# Altium PCB WCH_hairDrierBOTTOM_COM_V1.5.PcbDoc
Units mil, origin at the board's own origin, x right, y up, seen from the top; angles counter-clockwise.
Board outline 2681.13 x 2654.17 mil, 2 copper layers (Top Layer, Bottom Layer); 68 components, 37 nets, 171 pads, 211 vias.
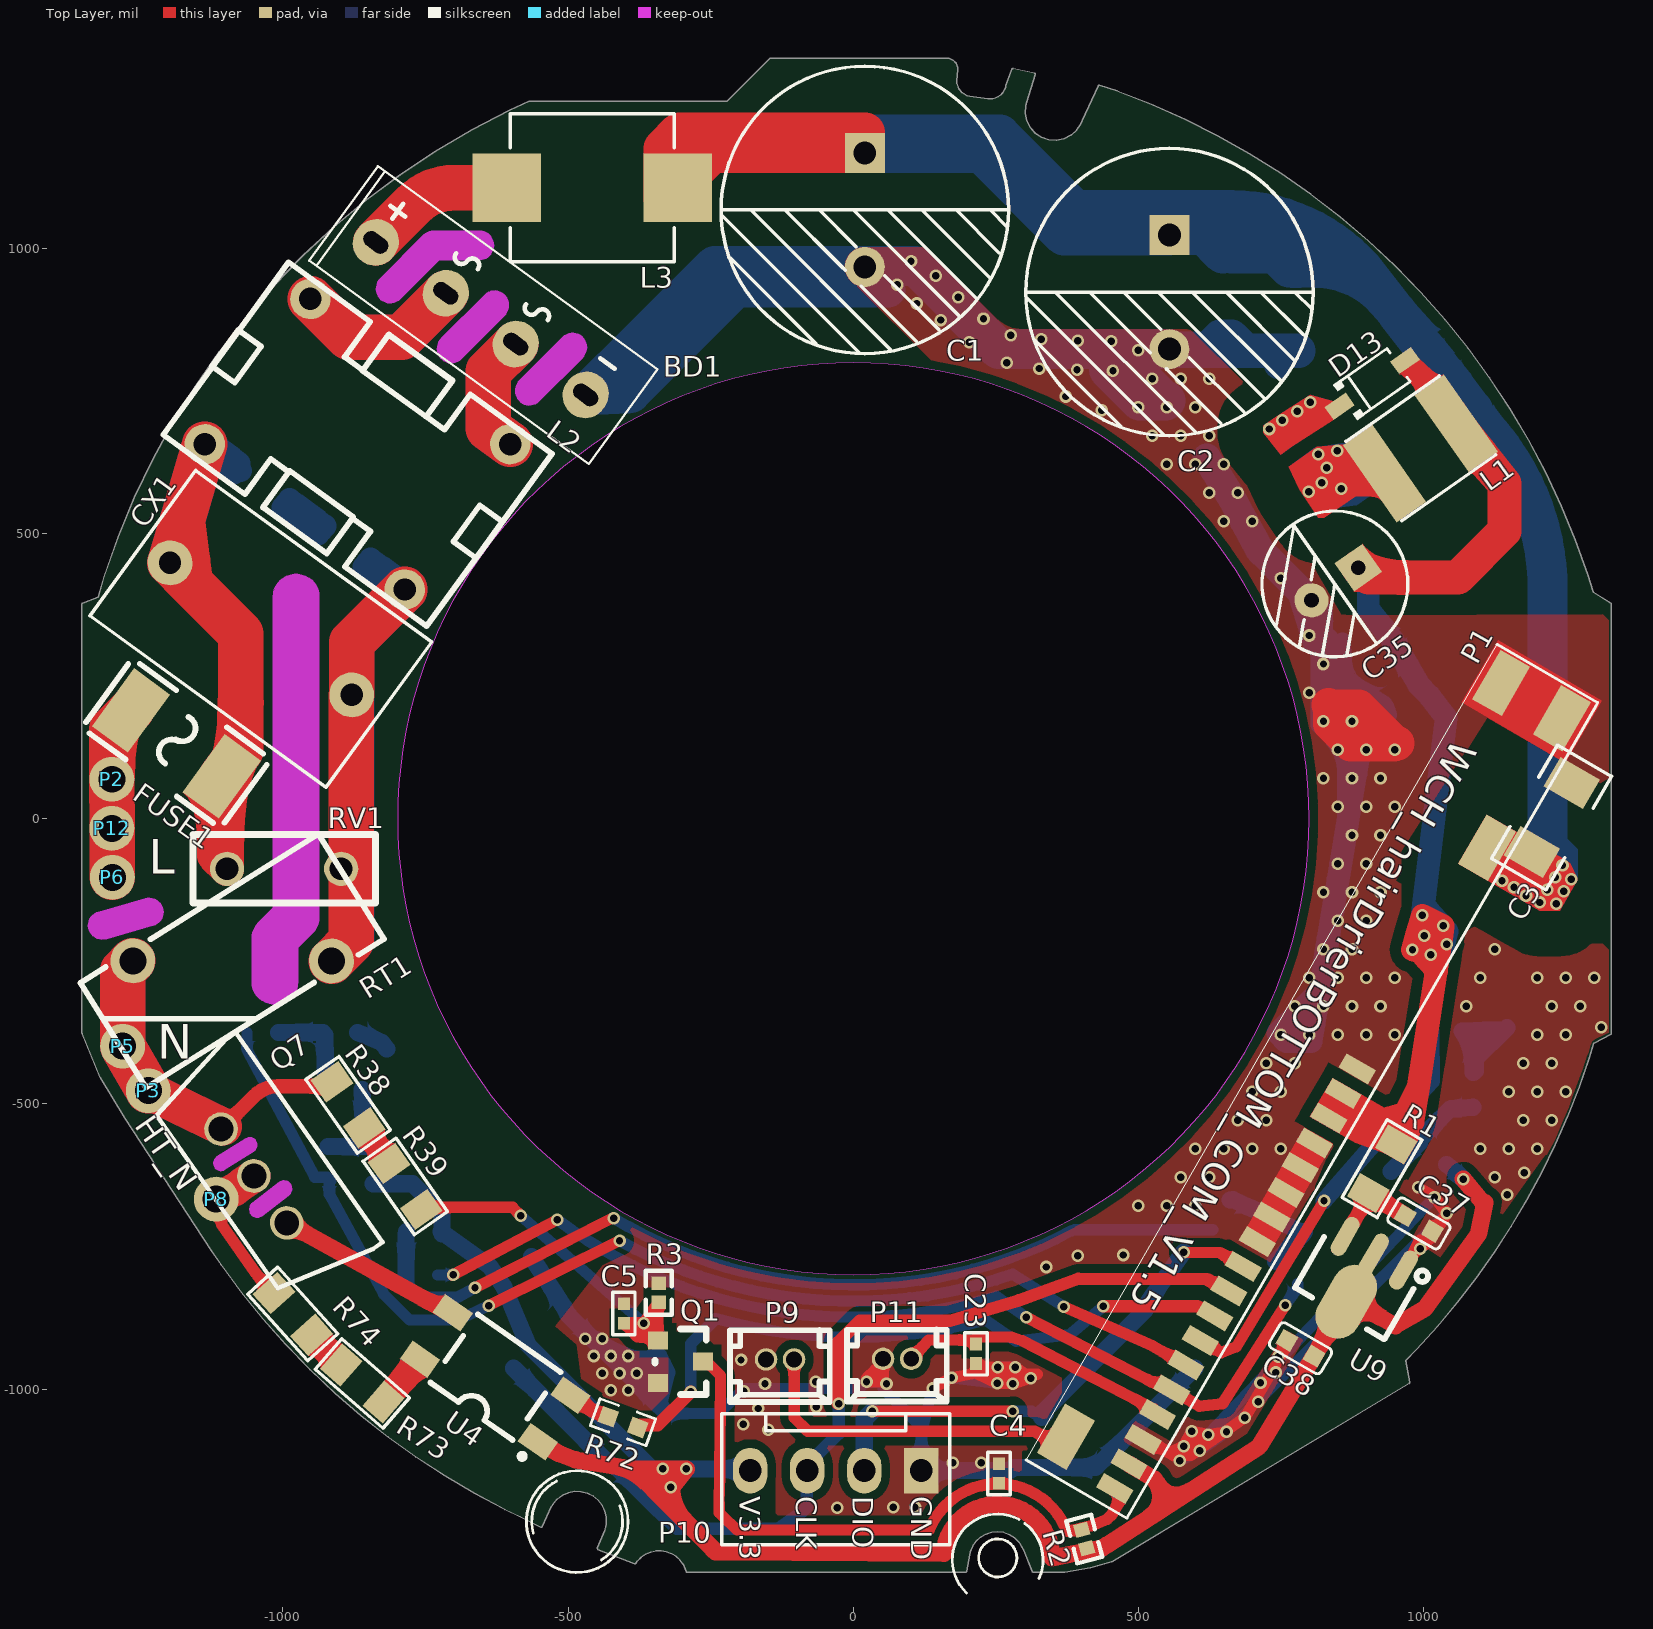
[diagram p0: Top Layer view]
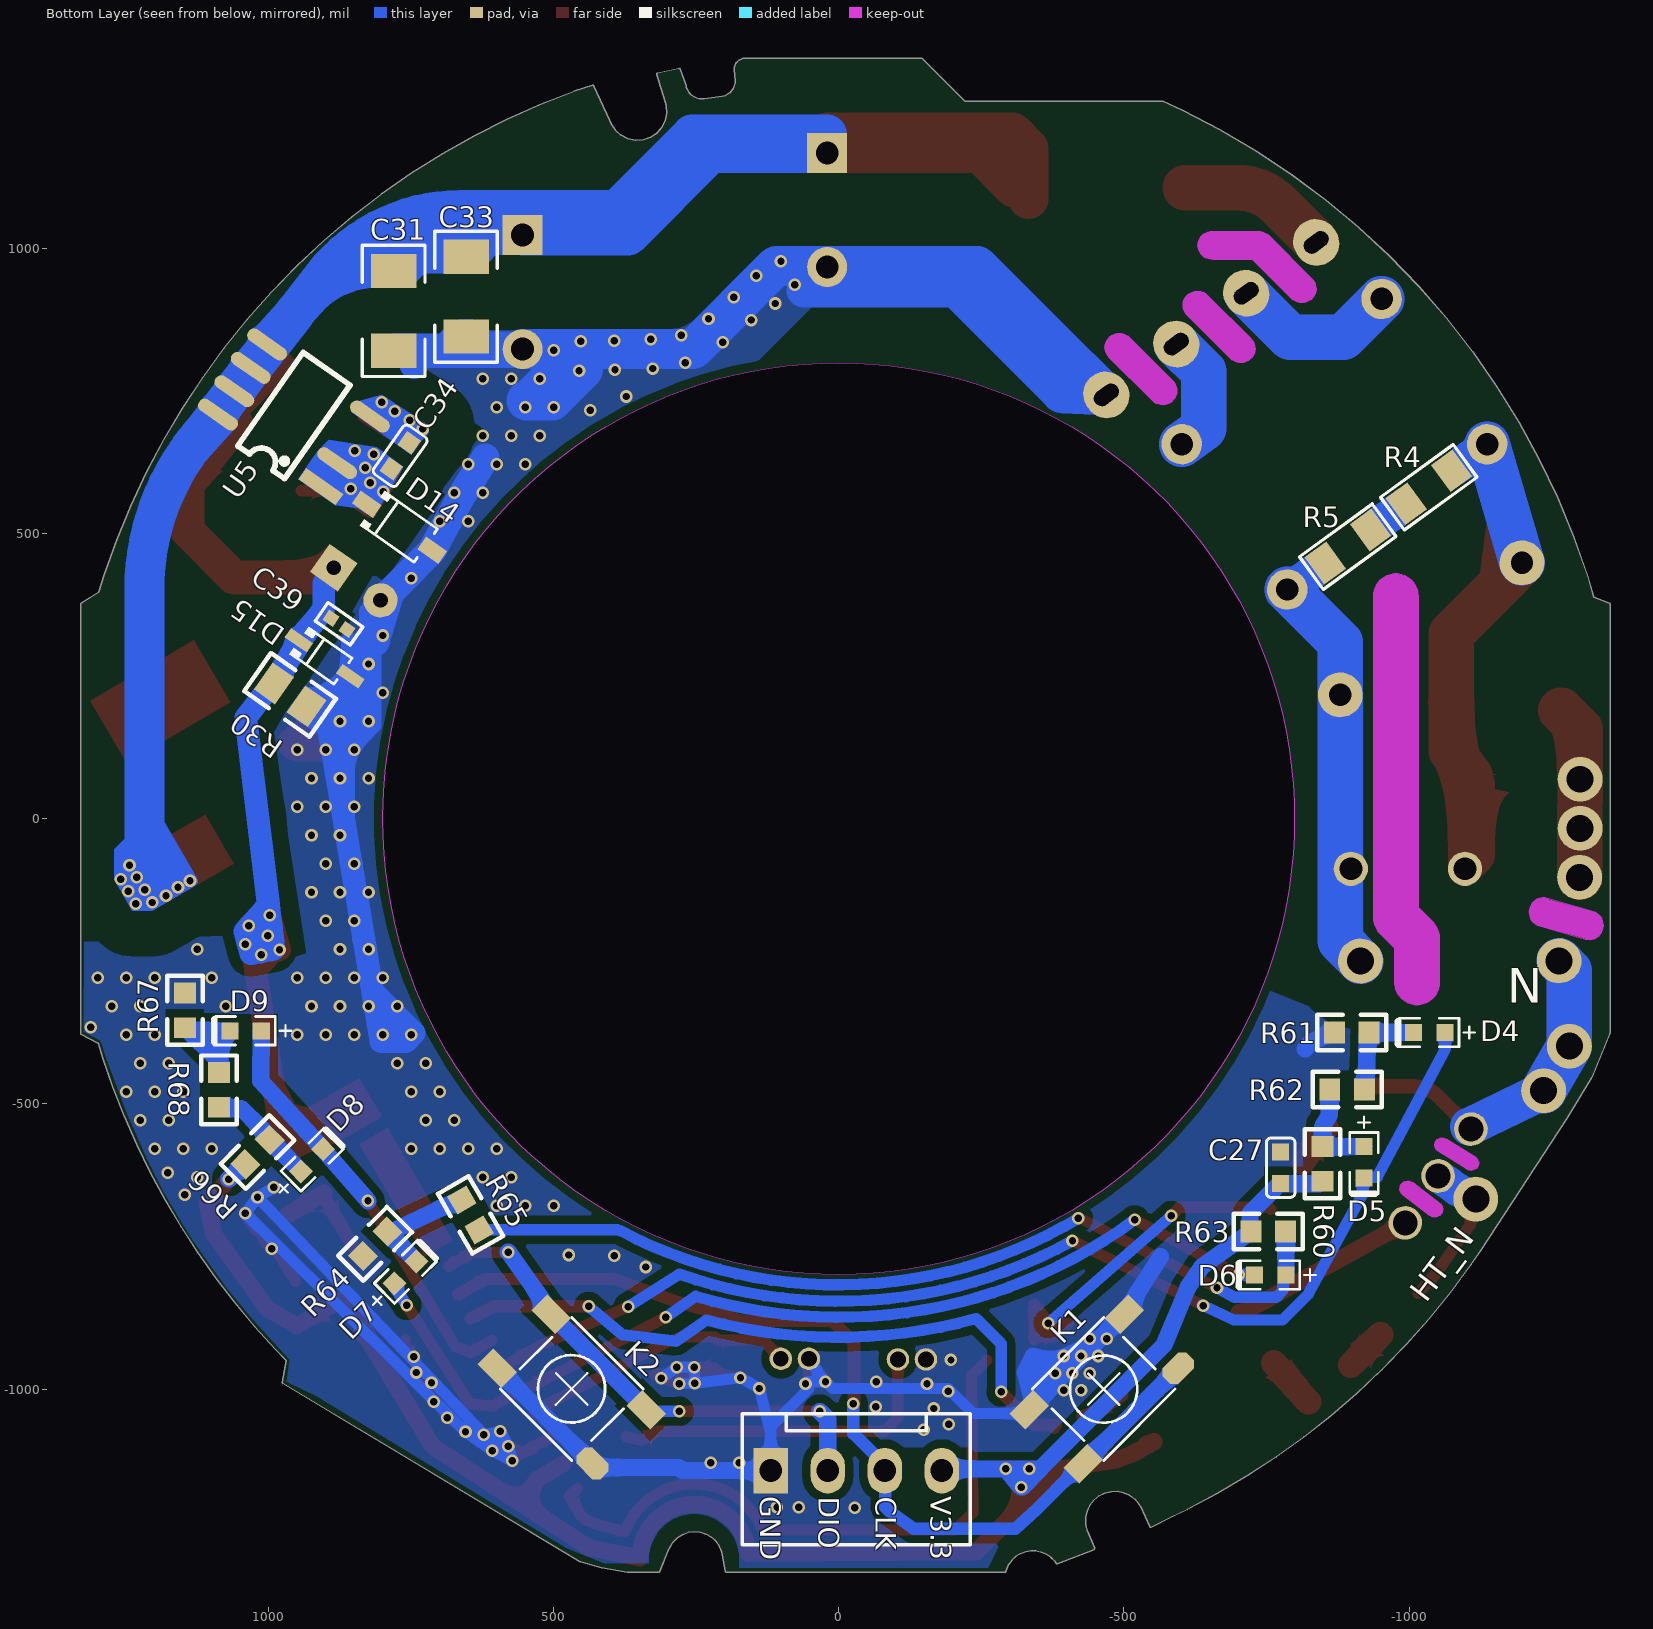
[diagram p1: Bottom Layer view, seen from below]

## Layer stack, top to bottom
Top Solder: solder mask 0.4, Solder Resist, Dk 3.5
Top Layer: signal copper 1.4
Dielectric1: dielectric 12.6, FR-4, Dk 4.8
Bottom Layer: signal copper 1.4
Bottom Solder: solder mask 0.4, Solder Resist, Dk 3.5

## Board outline
393 vertices, not listed, extent -1352.38,-1321.48 1328.76,1332.69
cut-out: -1115.92,-592.98 ccw(c-1109,-604) -1102.08,-615.02 -1051.08,-583.02 ccw(c-1058,-572) -1044.99,-572 ccw(c-1058,-572) -1064.92,-560.98
cut-out: -1053.52,-673.87 ccw(c-1045,-685) -1036.48,-696.13 -989.48,-660.13 ccw(c-998,-649) -983.99,-649 ccw(c-998,-649) -1006.52,-637.87
cut-out: -799.21,0 ccw(c0,0) 0,-799.21 ccw(c0,0) 799.21,0 ccw(c0,0) 0,799.21 ccw(c0,0)
cut-out: -1054.01,-286 -1054.01,-210 cw(c-1014,-210) -1042.29,-181.71 -1017.01,-156.43 -1017.01,389 cw(c-977,389) -936.99,389 -936.99,-173 cw(c-977,-173) -948.71,-201.29 -973.99,-226.57 -973.99,-286 cw(c-1014,-286)
cut-out: -1309.17,-211.06 cw(c-1316,-187) -1322.83,-162.94 -1241.83,-139.94 cw(c-1235,-164) -1209.99,-164 cw(c-1235,-164) -1228.17,-188.06
cut-out: -585.69,767.69 ccw(c-568,750) -550.31,732.31 -474.31,808.31 ccw(c-492,826) -466.98,826 ccw(c-492,826) -509.69,843.69
cut-out: -722.69,841.69 ccw(c-705,824) -687.31,806.31 -611.31,882.31 ccw(c-629,900) -603.99,900 ccw(c-629,900) -646.69,917.69
cut-out: -829.69,946.69 ccw(c-812,929) -794.31,911.31 -725.64,979.99 -655,979.99 ccw(c-655,1005) -629.99,1005 ccw(c-655,1005) -655,1030.01 -736,1030.01 ccw(c-736,1005) -753.69,1022.69

## Design rules (kind name [scope] priority, off if disabled: settings)
Clearance Clearance_2 [InNet('V12')] p1: gap=20 ignorepadtopadclearanceinfootprint=TRUE
Clearance Clearance_1 [InPolygon vs InNetClass('HVNET')] p2: gap=80 ignorepadtopadclearanceinfootprint=TRUE
Clearance GNDClearance [InNet('GND') vs IsComponentBody] p3: gap=18 ignorepadtopadclearanceinfootprint=TRUE except(0: Arc-Hole Track-Hole SMDPad-Hole THPad-Hole Via-Hole Fill-Hole Poly-Hole Region-Hole Text-Hole)
Clearance PolygonClearance [(InPolygon)] p4: gap=15 ignorepadtopadclearanceinfootprint=TRUE
Clearance [All] p5: gap=6 ignorepadtopadclearanceinfootprint=TRUE
FabricationTestPointUsage TestPointUsage [All] p1: valid=0 allowmultiple=FALSE
FabricationTestpoint Testpoint [(IsPad And (OnTopLayer Or OnBottomLayer))] p1: side=3 testpointundercomponent=TRUE minsize=40 maxsize=100 preferedsize=60 minholesize=0 maxholesize=40 preferedholesize=32 testpointgrid=1 allowsidetop=TRUE allowsidebottom=TRUE usegrid=TRUE gridtolerance=0.01
Height [All] p1: minheight=0 maxheight=1574.8 prefheight=500
HoleSize [All] p1: absolutevalues=TRUE maxlimit=157.48 minlimit=1 maxpercent=80.000 minpercent=20.000
PlaneConnect [All] p1: planeconnectstyle=Relief reliefexpansion=20 reliefentries=4 reliefconductorwidth=12 reliefairgap=10
PolygonConnect PolygonConnect_1 [IsVia] p1: connectstyle=Direct reliefconductorwidth=10 reliefentries=4 polygonreliefangle="90 Angle" airgapwidth=10
PolygonConnect [All] p2: connectstyle=Direct reliefconductorwidth=15 reliefentries=4 polygonreliefangle="90 Angle" airgapwidth=10
RoutingVias [All] p1: holewidth=20 width=30 viastyle="Through Hole" minholewidth=13 minwidth=21 maxholewidth=40 maxwidth=80
SilkToSolderMaskClearance SilkscreenOverComponentPads [IsPad] p1: minsilkscreentomaskgap=10 clearancetoexposedcopper=TRUE
SolderMaskExpansion [All] p1: expansion=4 istentingtop=FALSE
Width [All] p1: maxlimit=300 minlimit=5 preferedwidth=10 minimp=50.000000 maximp=50.000000 favimp=50.000000
24 further rules are at their usual default settings.

## Classes and differential pairs
net class HVNET: AC220_L AC220_L1 AC220_N AC220_N1 HEAT_N NetC34_1 NetC34_2 NetR73_1 V310 V310_IN

## Components (designator, comment, footprint, x,y, rotation, side; value= is the part's Value field where it differs from the comment)
BD1 "KBP310K" 3KBP -650,874 r234 top
C1 "47uF/400V" RB-.2/.4-M 20,1067 r0 top locked
C2 "47uF/400V" RB-.2/.4-M 554,923 r0 top
C3 "0.1uF/450V" 1206 1224,2 r60 top
C4 "1nF" M_C0402- 254.63,-1147.13 r90 top
C5 "10nF" M_C0402- -402.82,-866.9 r90 top
C23 "0.1uF" M_C0402- 215,-939 r270 top
C27 "10uF" 0603C -772,-614 r90 bottom
C31 "0.1uF/450V" 1206 780,890 r270 bottom
C33 "0.01uF/450V" 1206 653,915 r270 bottom
C34 "10uF/25V" 0603C 765,636 r305 bottom
C35 "100uF/25V" RB-.1/.2 885,440 r305 top
C37 "10uF/25V" 0603C 991,-706 r330 top
C38 "10uF" 0603C 784,-932 r150 top
C39 "0.1uF" M_C0402- 874.77,341.28 r215 bottom
CX1 "0.68uF/275V" CAP-HV-10NF275V-680uf10mm -881,218 r144 top
D4 "LED" LED-0603 -1035.62,-585 r0 bottom locked
D5 "LED" LED-0603 -1131,-602.5 r270 bottom locked
D6 "LED" LED-0603 -756.5,-1010 r0 bottom locked
D7 "LED" LED-0603 907.94,-646.95 r135 bottom locked
D8 "LED" LED-0603 1071.59,-450.3 r135 bottom locked
D9 "LED" LED-0603 1039.5,-582 r0 bottom locked
D13 "ES1JL" SOD-123 909.66,762.85 r215 top
D14 "ES1JL" SOD-123 769.66,510.85 r35 bottom
D15 "zmm18" SOD-323 901,281 r35 bottom
FUSE1 "250V/4A" FUSE_SMD -1178,144 r144 top
K1 "KH-6X6X8H-STM" KEY2-SMD -462.72,-999.01 r315 bottom locked
K2 "KH-6X6X8H-STM" KEY2-SMD 467.01,-997.72 r45 bottom locked
L1 "1mH" INDUCTOR-5040 994,649 r125 top
L2 "NC(20x18)" M_COMM_INDUCTOR11*8 -860,668 r324 top
L3 "NC(33uH/3A)" "INDUCTOR PCMC063T" -458,1106 r0 top
P1 "18PIN" P1.27-18-SMD 457.86,-1174.44 r60 top
P2 "AC_L" PAD-1.2/2 -1298,68 r0 top
P3 "AC_N" PAD-1.2/2 -1234,-478 r0 top
P5 "NI_N" PAD-1.2/2 -1279,-400 r0 top
P6 "NI_L" PAD-1.2/2 -1297,-104 r0 top
P8 "HEAT_N" PAD-1.2/2 -1115,-668 r0 top
P9 "NTC" GH1.25-2P -218.2,-895 r0 top
P10 "SWD" 2510-4 -31,-1143 r0 top locked
P11 "KEY3" GH1.25-2P -13,-894 r0 top
P12 "AC_220L" PAD-1.2/2 -1298,-18 r0 top
Q1 "S8050" SOT-23 -303.3,-951.94 r270 top
Q7 "BAT16" M_TO220_2 -1050.95,-624.77 r305 top
R1 "100Ω" 1206- 927,-615 r60 top
R2 "10k" M_R0402 408.55,-1281.19 r105 top
R3 "3.3k" M_R0402 -340,-812.54 r270 top
R4 "470k" 1206- -1035,582 r324 bottom
R5 "470k" 1206- -893,478 r324 bottom
R30 "2kΩ" 0805 932.59,196.8 r35 bottom
R38 "150k" 1206- -884.57,-502.1 r125 top
R39 "150k" 1206- -784.57,-645.1 r125 top
R60 "1k" 0603#1 -848,-575 r270 bottom
R61 "1k" 0603#1 -930,-375 r0 bottom
R62 "510Ω" 0603#1 -861,-475 r180 bottom
R63 "1k" 0603#1 -783.63,-724 r0 bottom
R64 "1k" 0603#1 791,-724 r315 bottom
R65 "510Ω" 0603#1 630,-721 r60 bottom
R66 "1k" 0603#1 997.13,-563.13 r315 bottom
R67 "1k" 0603#1 1146,-366.63 r90 bottom
R68 "510Ω" 0603#1 1086,-506 r90 bottom
R72 "300 Ω" 0603#2 -404,-1058 r340 top
R73 "51Ω" 1206- -862,-990 r319 top
R74 "51Ω" 1206- -984,-868 r312 top
RT1 "8D-13" RT_5D -1091,-253 r32 top
RV1 "07D471K" 7D391 -998,-88 r180 top
U4 "M3063" SOP-4_L3.8-W4.6-H2.0-LS7.0-P2.54 -633,-977 r325 top
U5 "PN8034" SOP-7 906.04,580.9 r125 bottom
U9 "1117-3.3" SOT-89 922.78,-741.1 r150 top

## Footprints (in the part's own frame and the unit in brackets; to place one, negate y for a bottom-side part, rotate by r counter-clockwise, add the part's x,y. Pads: shape width x height; smd on the part's side, far side on the other; paste and mask are expansions set on the pad)
3KBP [mm]
  oval 2.1x2 hole 0.7 slot 1.2 at 90 deg: 1(0,-5.879) 2(0,-2.029) 3(0,1.821) 4(0,5.671)
  silkscreen extent -2.8,-7.8 2.4,7.6
7D391 [mil]
  round 60 hole 40: 1(-100,0) 2(100,0)
  silkscreen extent -160,-60 160,60
0603#1 [mm]
  rect 0.93x0.98 smd: 1(0,0) 2(1.54,0)
  silkscreen extent -0.76,-0.79 2.3,0.79
0603#2 [mm]
  rect 0.762x0.762 smd: 1(-0.698,0) 2(0.698,0)
  silkscreen extent -1.32,-0.64 1.32,0.64
0603C [mil]
  rect 30x30 smd: 1(-25.5,-3) 2(29.5,-3)
  silkscreen extent -50,-28 54,22
0805 [mm]
  rect 1.16x1.47 smd: 1(0,0) 2(1.78,0)
  silkscreen extent -0.88,-1.04 2.66,1.03
1206 [mil]
  rect 60x80 smd: 1(-70,0) 2(70,0)
  silkscreen extent -115,-55 115,55
1206- [mm]
  rect 1.2x1.5 smd: 1(-1.224,0.018) 2(1.276,0.018)
  silkscreen extent -1.97,-0.88 2.03,0.92
2510-4 [mil]
  rect 60x80 hole 40: 1(150,0)
  oval 60x80 hole 40: 2(50,0) 3(-50,0) 4(-150,0)
  silkscreen extent -200,-130 200,100
CAP-HV-10NF275V-680uf10mm [mm]
  round 2 hole 1: 1(9.953,0) 2(-0.047,0)
  silkscreen extent -1.55,-4 11.45,4
FUSE_SMD [mil]
  rect 78.7x126 smd mask+2: 1(-98.4,15) 2(98.4,15)
  silkscreen extent -150,-60 150,90
GH1.25-2P [mil]
  round 39.4 hole 27.6 mask+2: 1(65,-53) 2(114.2,-53)
  silkscreen extent 2,-128 177,-2
"INDUCTOR PCMC063T" [mil]
  rect 120x120 smd: 1(-150,0) 2(150,0)
  silkscreen extent -144,-130 144,130
INDUCTOR-5040 [mm]
  rect 4.2x1.6 smd: 1(0,1.95) 2(0,-1.95)
  silkscreen extent -2.16,-2.59 2.16,2.54
KEY2-SMD [mm]
  oct 1.5x1 smd: 1(-3.023,1.749)
  rect 1.5x1 smd: 2(2.977,1.749) 3(-3.023,-1.651) 4(2.977,-1.651)
  silkscreen extent -2.27,-2.2 2.23,2.3
LED-0603 [mil]
  rect 30x30 smd: 1(-27.5,-210) 2(27.5,-210)
  silkscreen extent -80,-235 55,-185
M_C0402- [mm]
  rect 0.566x0.54 smd mask+0.051: 1(-0.454,-0.009) 2(0.412,-0.009)
  silkscreen extent -0.97,-0.51 0.92,0.49
M_COMM_INDUCTOR11*8 [mm]
  round 1.8 hole 1: 1(-5.514,-4.378) 2(-5.514,3.622) 3(5.486,3.622) 4(5.486,-4.378)
  silkscreen extent -7.3,-5.13 7.24,4.4
M_R0402 [mm]
  rect 0.6x0.65 smd mask+0.051: 1(0.051,-0.025) 2(0.901,-0.025)
  silkscreen extent -0.5,-0.6 1.45,0.55
M_TO220_2 [mm]
  round 1.5 hole 1.1: 1(-2.514,-0.025) 2(0.036,-0.025) 3(2.586,-0.025)
  silkscreen extent -5.66,-2.03 5.74,2.97
P1.27-18-SMD [mm]
  rect 0.74x1.5 smd: 1(-0.001,-0.01) 2(1.269,-0.01) 3(2.539,-0.01) 4(3.809,-0.01) 5(5.079,-0.01) 6(6.349,-0.01) 7(7.619,-0.01) 8(8.889,-0.01) 9(10.159,-0.01) 10(11.429,-0.01) 11(12.699,-0.01) 12(13.969,-0.01) 13(15.239,-0.01) 14(16.509,-0.01) 15(17.779,-0.01) 16(19.049,-0.01) 17(20.319,-0.01) 18(21.589,-0.01)
PAD-1.2/2 [mm]
  round 2 hole 1.2 mask+0.1: 1(-0.051,0.025)
RB-.1/.2 [mil]
  rect 60x60 hole 25.59: 1(0,0)
  round 60 hole 25.59: 2(0,-100)
  silkscreen extent -128,-178 128,78
RB-.2/.4-M [mil]
  rect 70x70 hole 40: 1(0,100)
  round 70 hole 40: 2(0,-100)
  silkscreen extent -252,-252 252,252
RT_5D [mil]
  round 78.7 hole 47.2 mask+2: 1(-144.1,94.4) 2(151.1,-90.6)
  silkscreen extent -243,-106 250,110
SOD-123 [mil]
  rect 45x27.56 smd: 1(-70,0) 2(70,0)
  silkscreen extent -56,-38 59,38
SOD-323 [mil]
  rect 47.24x20 smd: 1(-55,0) 2(55,0)
  silkscreen extent -39,-30 55,30
SOP-4_L3.8-W4.6-H2.0-LS7.0-P2.54 [mil]
  rect 59.1x39.4 smd mask+2: 1(131.55,-48.8) 2(131.55,51.2) 3(-120.45,51.2) 4(-120.45,-48.8)
  silkscreen extent -83,-90 128,74
SOP-7 [mil]
  rect 24x80 smd: 1(0,2)
  oval 24x80 smd: 2(50,2) 3(150,2) 4(150,222) 5(100,222) 6(50,222) 7(0,222)
  silkscreen extent -25,62 175,162
SOT-23 [mm]
  rect 0.8x0.9 smd: 1(-0.95,-1) 2(0.95,-1) 3(0,1)
  silkscreen extent -1.46,-1.14 1.46,1.15
SOT-89 [mm]
  oval 0.7x1.9 smd: 1(-1.553,0.577) 3(1.449,0.577)
  oval 0.7x2.1 smd: 2(-0.052,0.676)
  oval 2x3.5 smd: 2(-0.052,3.076)
  silkscreen extent -2.67,0.14 2.25,3.68

## Part data
BD1: BOM_JLCPCB Part Class="Extended Part", BOM_Manufacturer=MDD, BOM_Manufacturer Part=KBP310K, BOM_Supplier=LCSC, BOM_Supplier Part=C2496, spicePre=D, spiceSymbolName=KBP310K
C1 C2 C35: library part "CAPACITOR POL_2", "Capacitor"
C3 C4 C5 C23 C27 C31 C33 C34 C37 C38 C39: library part "Cap Semi", "Capacitor (Semiconductor SIM Model)", LatestRevisionDate=17-Jul-2002, LatestRevisionNote="Re-released for DXP Platform.", PackageReference=C0805, Published=8-Jun-2000, Publisher="Altium Limited"
CX1: library part Cap, "Capacitor", LatestRevisionDate=17-Jul-2002, LatestRevisionNote="Re-released for DXP Platform.", Published=8-Jun-2000, Publisher="Altium Limited"
D13 D14: library part "Diode 1N4148", "High Conductance Fast Diode", Code_JEDEC=DO-204-AH, ComponentLink1Description="Manufacturer Link", ComponentLink1URL=http://www.fairchildsemi.com/, ComponentLink2Description=Datasheet, ComponentLink2URL=http://www.fairchildsemi.com/ds/1N%2F1N4148.pdf, DatasheetDocument=1997, LatestRevisionDate=17-Jul-2002, LatestRevisionNote="Re-released for DXP Platform.", PackageReference=DO-35, Published=8-Jun-2000, Publisher="Altium Limited"
D15: library part DIODE_ZENER
FUSE1: library part FUSE
K1 K2: Contact Current=50mA, IP Rating=-, JLCPCB Part Class="Extended Part", Voltage Rating (DC)=12V, Add into BOM=yes, Convert to PCB=yes, Datasheet=https://atta.szlcsc.com/upload/public/pdf/source/20210608/C2837534_94EAC7D8AFBB996E2814FACF50FEEF85.pdf, Device=KH-6X6X8H-STM, LCSC Part Name=KH-6X6X8H-STM, Manufacturer Part=KH-6X6X8H-STM, Mechanical Life=80000, Name=KH-6X6X8H-STM, Operating Force=-, Operating Temperature=-, Power Rating=-, Supplier=LCSC, Supplier Footprint=SMD, Supplier Part=C2837534, Switch Height=-, Switch Length=6mm, Switch Width=6mm, Symbol=KH-6X6X8H-STM, Voltage Rating (AC)=-, With Lamp=-
L1 L3: library part INDUCTOR
L2: library part UU9.8-5mH, JLCPCB Part Class="Extended Part", Add into BOM=yes, Convert to PCB=yes, Datasheet=https://atta.szlcsc.com/upload/public/pdf/source/20180308/C116373_15204885408701413779.pdf, Device=UU9.8-5mH, Manufacturer Part=UU9.8-5mH, Supplier=LCSC, Supplier Footprint="Through Hole", Supplier Part=C116373, Symbol=UU9.8-5MH
P2 P3 P5 P6 P8 P12: library part 1PIN, "CONNECTOR"
P9 P11: library part 2PIN
P10: library part 4PIN
Q1: library part S8050_C105433, Collector Current (Ic)=500mA, Collector Cut-Off Current (Icbo)=100nA, Collector-Emitter Breakdown Voltage (Vceo)=25V, Collector-Emitter Saturation Voltage (VCE(sat)@Ic,Ib)=600mV@500mA,50mA, DC Current Gain (hFE@Ic,Vce)=120@50mA,1V, JLCPCB Part Class="Extended Part", Power Dissipation (Pd)=300mW, Transition Frequency (fT)=150MHz, Add into BOM=yes, Convert to PCB=yes, Datasheet=https://atta.szlcsc.com/upload/public/pdf/source/20170415/1492237762328.pdf, Device=S8050_C105433, Manufacturer Part=S8050, Name=S8050, Supplier=LCSC, Supplier Footprint=SOT-23, Supplier Part=C105433, Symbol=S8050_C105433, Transistor Type=NPN
Q7: library part Triac, "Silicon Bidirectional Triode Thyristor", Code_JEDEC=TO-251-AA, ComponentLink1Description="Manufacturer Link", ComponentLink1URL=http://www.motorola.com/, DatasheetDocument=1999, LatestRevisionDate=17-Jul-2002, LatestRevisionNote="Re-released for DXP Platform.", Note="Pin 2 is electrically connected to Pin 4 (TAB)", PackageReference=369-03, Published=29-Sep-2000, Publisher="Altium Limited"
R1 R2 R3 R4 R5 R30 R38 R39 R60 R61 R62 R63 R64 R65 R66 R67 R68 R72 R73 R74: library part Res2, "Resistor", LatestRevisionDate=17-Jul-2002, LatestRevisionNote="Re-released for DXP Platform.", PackageReference=AXIAL-0.4, Published=8-Jun-2000, Publisher="Altium Limited"
RT1: library part "NTC 5D-11", B Constant Tolerance=-, JLCPCB Part Class="Extended Part", Steady State Current (Max)=4A, Add into BOM=yes, Convert to PCB=yes, Datasheet=https://atta.szlcsc.com/upload/public/pdf/source/20160823/1471947562750.pdf, Device="NTC 5D-11", Manufacturer Part="NTC 5D-11", Power=-, Resistance Tolerance=-, Supplier=LCSC, Supplier Part=C9179, Symbol=MF72-5D-11
RV1: library part RV
U4: library part FODM3063, JLCPCB Part Class="Extended Part", Add into BOM=yes, Convert to PCB=yes, Datasheet=https://atta.szlcsc.com/upload/public/pdf/source/20210806/C891200_48E5BDA4CE18C6C5D79106BC56C23B01.pdf, Device=FODM3063, LCSC Part Name=FODM3063, Manufacturer Part=FODM3063, Supplier=LCSC, Supplier Footprint=Mini-Flat-4, Supplier Part=C891200, Symbol=FODM3063
U5: library part PN8054

## Free pads (board coordinates)
  rect 100x60 smd rot 60: 0(372.32,-1083.82) 0(1135.37,237.82) GND(1242,175.9) V310(1111,-51)

## Via types
v1: diameter 22/22 (per signal layer), hole 13, Top Layer to Bottom Layer, tented both sides, 155 vias
v2: diameter 22, hole 13, Top Layer to Bottom Layer, tented both sides, 56 vias

## Nets (pads, with @x,y where several pads share a name; then routed paths per layer and width w, separated by ;. In a path a pad name is that pad's centre, name@x,y a point inside that pad or via, vN(x,y) a via of type N, cw(c..) or ccw(c..) an arc to the next point about the centre after c; other vN are vias at no path point)
AC220_L: FUSE1.2 P2.1 P6.1 P12.1 | length 306.6
  Top Layer w80: P6.1 -1299.5,-17 P2.1 -1300,156.13 FUSE1.2
AC220_L1: CX1.1 FUSE1.1 L2.1 R4.1 RV1.2 | length 1554.8
  Top Layer w60: -1121.11,-64.89 -1121.11,60.13 FUSE1.1 cw(c-1129.44,51.79) -1098,51.79 RV1.2 -1121.11,-64.89
  Top Layer w80: L2.1 -1176.42,521.82 ; FUSE1.1 -1074,119 -1074,324.31 -1162.34,412.66 ; -1176.42,521.82 CX1.1 -1162.34,412.66 ; -1176.42,521.82 -1167.45,452.26 -1162.34,412.66
  Bottom Layer w40: L2.1@-1148.37,652.15 R4.1@-1086,606 ; L2.1@-1139.37,669.15 R4.1@-1077,623 ; L2.1 R4.1
  Bottom Layer w80: CX1.1 L2.1
AC220_L2: BD1.2 L2.2 | length 593.6
  Top Layer w80: L2.2 -884.85,844 -791.57,844 BD1.2
  Bottom Layer w80: L2.2 -884.85,844 -791.57,844 BD1.2
AC220_N: P3.1 P5.1 Q7.1 R38.2 RT1.1 | length 1000.4
  Top Layer w25: Q7.1 -1050.89,-486.63 cw(c-1009.06,-528.35) -1009.06,-469.27 R38.2@-920.31,-469.27
  Top Layer w67: P3.1 Q7.1@-1105.58,-539.76
  Top Layer w80: RT1.1 -1281,-267.08 P5.1 P3.1
  Bottom Layer w67: P3.1 Q7.1@-1105.58,-539.76
  Bottom Layer w80: RT1.1 -1281,-267.08 P5.1 P3.1
AC220_N1: CX1.2 L2.4 R5.2 RT1.2 RV1.1 | length 1645.2
  Top Layer w80: RT1.2 -880,-214.91 -880,216.42 CX1.2 -879.5,308.69 L2.4
  Bottom Layer w40: R5.2@-858.37,441.15 L2.4@-796,395 ; R5.2 -849,446.95 L2.4 ; R5.2@-846.37,455.15 L2.4@-784,409
  Bottom Layer w80: RT1.2 -879.5,-214.42 CX1.2 -879.5,308.69 L2.4
AC220_N2: BD1.3 L2.3 | length 430.3
  Top Layer w80: L2.3 -640,684 -640,783.85 BD1.3
  Bottom Layer w80: L2.3 -640,684 -640,783.85 BD1.3
ADC_NTC: P9.2 pad.0@372.32,-1083.82 | length 593.3
  Top Layer w20: P9.2 -104,-1050 -80,-1074 317.75,-1074 345.61,-1090.09 pad.0@372.32,-1083.82
GND: BD1.4 C1.2 C2.2 C3.2 C4.2 C5.2 C23.2 C27.2 C31.2 C33.2 C35.2 C37.2 C38.2 C39.2 D14.1 D15.1 K1.3 K1.4 K2.1 K2.2 P1.3 P1.11 P1.12 P1.13 P1.14 P1.15 P1.18 P9.1 P10.1 P11.1 pad.0@1135.37,237.82 pad.GND Q1.2 R3.1 R30.1 R61.2 R64.2 R67.2 U9.1 | length 10807.6
  Top Layer w20: P11.1 P11.1@52,-952.25 ; v2(139,-999) v2(172,-980) 207,-973.5 212,-968.5 ; 321.98,-974.03 311.04,-973.98 300.95,-973.93 ; P1.3@493.55,-1074.35 P1.3 526.05,-1096.16 551.82,-1111.04 ; v2(607,-1108) v2@609.05,-1104.17 ; v2(654,-1075) v2@649.79,-1075.66 ; C38.2 760.83,-920.93 v1(686.3,-1050.02) 680.74,-1054 652.92,-1073.46 v2@649.79,-1075.66 ; v2(990.18,-646.39) v2(1018.64,-663.55) v2(1040,-692) 1021.88,-721.52 C37.2 1000,-749 993.62,-753.46 U9.1@980.36,-762.74 ; 992.46,-739.17 986.76,-750.28 U9.1@980.36,-762.74 ; 37,-987.38 53.84,-987.38 57.46,-991 v2(58,-991) 58,-990.46 52,-984.46 P11.1@52,-952.25 ; 37,-987.38 23.38,-987.38 v2(23,-987) 23.38,-986.62 23.38,-980.87 38.62,-965.62 ; 37,-987.38 38.62,-985.76 38.62,-965.62 ; 38.62,-965.62 P11.1@52,-952.25 ; 212,-968.5 217,-963.5 v2(253,-962) v2(284,-962) 300.95,-973.93 ; 212,-968.5 217,-973.5 ; 217,-973.5 252.08,-973.68 252.94,-973.68 279.09,-973.81 283.94,-973.84 300.95,-973.93 ; 217,-973.5 v2(252,-990) v2(279,-991) v2(311,-981) 300.95,-973.93 ; 551.82,-1111.04 565.02,-1106.35 v2(579,-1100) v2(593,-1074) 609.73,-1077.46 ; 551.82,-1111.04 561.8,-1116.8 567.3,-1116.87 571.77,-1116.76 579.41,-1116.57 591.76,-1116.27 ; 591.76,-1116.27 605.87,-1106.39 v2@609.05,-1104.17 ; 591.76,-1116.27 595.71,-1107.74 597.61,-1103.65 608.1,-1080.99 609.73,-1077.46 ; v2@609.05,-1104.17 629.1,-1090.14 v2@649.79,-1075.66 ; v2@609.05,-1104.17 v2(622,-1080) ; 609.73,-1077.46 v2(622,-1080) ; v2(622,-1080) v2@649.79,-1075.66 ; U9.1@980.36,-762.74 980,-763 963.7,-790.94 952,-811 U9.1 976.19,-770.88 U9.1@980.36,-762.74
  Top Layer w60: 833,199 836,196 ; 953.54,131.95 950,132 ; pad.GND@1243.62,174.91 pad.GND@1251,187 ; 836,196 836,166 872,130 948,130 950,132 ; 836,196 886,196 950,132
  Bottom Layer w20: K1.4 -326.92,-1042.91 -235.91,-1042.91 -192,-999 10.46,-999 22.46,-987 v2(23,-987) 23.38,-986.62 23.38,-986.08 37.12,-972.33 37.12,-967.12 52,-952.25 P11.1 ; v2@23.38,-986.84 23.54,-987 23.92,-987.38 v2@52,-987.38 ; v2(58,-991) 57.46,-991 53.84,-987.38 v2@52,-987.38 ; P10.1 119,-1076 ; v2(279,-991) v2(252,-990) ; v2(311,-981) 294.4,-969.32 v2(284,-962) 276.88,-962 v2(253,-962) 252.58,-973.81 v2(252,-990) ; v2(990.18,-646.39) v2(1018.64,-663.55) ; v2@52,-987.38 52,-999 119,-1066 119,-1076 ; 119,-1076 v2(139,-999) v2(172,-980) v2(252,-990) ; 588.11,-1117.71 v2(607,-1108) ; 588.11,-1117.71 593.3,-1106.81 595.37,-1102.46 605.98,-1080.18 607.5,-1077 ; 588.11,-1117.71 v2(572,-1126) v2(579,-1100) v2(593,-1074) 607.5,-1077 ; v2(607,-1108) 630.22,-1091.7 v2(654,-1075) ; v2(607,-1108) v2(622,-1080) ; 607.5,-1077 v2(622,-1080) ; v2(622,-1080) 639.72,-1061.4 v2(1018.64,-663.55) ; v2(622,-1080) v2(654,-1075) ; v2(654,-1075) 985.82,-745.76 v2(1040,-692) v2(1018.64,-663.55)
  Bottom Layer w30: R61.2 -826.36,-392.58 -818,-403.72 ; -564.5,-768 -507.88,-855.33 K1.3 -490.64,-879.19 -455.42,-914.42 -433.92,-935.92 -394.42,-975.42 ; -453,-912 -427,-929 -401,-941 -372,-954 ; P10.1 174,-1143 224,-1143 274,-1143 279.47,-1137.53 424.61,-1137.53 K2.1 441.84,-1120.3 588.33,-973.81 K2.2 ; 835.57,317 825.91,317 ; D15.1@857.56,251.06 857.56,311.14 v1@825.91,279.49 ; D15.1@860,248 884.72,231.26 911.31,213.26 930.3,200.4 R30.1 938,182 916.09,168.4 909,164 ; 863.05,-26.52 863.05,21 863.05,32.83 863.05,79.2 863.05,116.95 ; 872.99,32.83 871,34.82 871,71 871,79.2 871,109 ; 893.59,225.26 909,209.85 909,200.3 909,179.82 909,164 ; -394.42,-975.42 -368.8,-982.25 ; -394.42,-975.42 -378.19,-991.64 -344.16,-1025.68 K1.4 -340.84,-1022.36 -332.63,-991.91 ; -372,-954 -344.82,-975.8 ; -372,-954 -341,-942 ; -368.8,-982.25 -348.03,-987.8 -332.63,-991.91 ; -368.8,-982.25 -344.82,-975.8 ; -344.82,-975.8 -327,-971 ; -341,-942 -334.13,-956.23 ; -341,-942 -334.13,-956.23 ; -334.13,-956.23 -327,-971 ; -332.63,-991.91 -327,-971 ; 816,241 816,271 816,289.4 ; 816,241 816,164 836,144 ; 816,241 838.2,263.2 838.2,267.2 ; 816,241 836,221 ; 816,289.4 v1@825.91,279.49 ; 816,289.4 816,292 803.08,304.92 803.08,321 803.08,339.6 803.08,379.94 C35.2 807.17,382.64 825.91,363.91 825.91,339.6 825.91,317 ; v1@825.91,279.49 825.91,292 825.91,317 ; v1@825.91,279.49 838.2,267.2 ; 836,144 836,171 836,221 ; 836,144 863.05,116.95 ; 836,221 863.05,193.95 ; 838.2,267.2 D15.1 849,245 849.33,244.55 873.16,212.61 891.47,188.06 897.61,179.82 909,164 ; 863.05,116.95 863.05,171 863.05,193.95 ; 863.05,116.95 871,109 ; 863.05,193.95 871,186 871,171 871,109
  Bottom Layer w40: v1@804.31,-377.23 802.73,-386.63 802.65,-387.12 802,-391 776.49,-391 ; v1@804.31,-377.19 805.83,-368.13 807.13,-360.35 ; 833,-211.49 832.2,-210.69 ; 897.31,179.78 897.61,179.82 897.38,178.42 894.12,158.99 891.54,143.57 887.01,116.51 886.7,114.7 880.76,79.2 872.99,32.83 861.23,-37.36 854.12,-79.86 849.66,-106.47 840.49,-161.23 832.2,-210.69 ; 776.49,-391 789.24,-378.24 807.13,-360.35 ; 776.49,-391 759,-391 744,-376 782.5,-337.5 802.8,-317.2 814.77,-305.23 816.37,-305.23 ; 807.13,-360.35 807.81,-356.3 809.59,-345.67 812.7,-327.11 816.37,-305.23 ; 816.37,-305.23 824.38,-257.38 828.99,-229.84 832.2,-210.69
  Bottom Layer w50: 619,633 632.82,610.89 646.7,588.69 659,569 684.71,521.6 D14.1 727.75,455.27 755.51,427.51 C35.2@786,397.02 ; C31.2@742,820 745,820 C31.2@745,796 ; C35.2@803.08,379.94 C35.2@800.38,382.64 ; C35.2 C35.2@800.38,382.64 ; 811,313 803.08,339.6 791.32,379.14 C35.2@786,397.02 ; C35.2@786,397.02 C35.2@800.38,382.64
  Bottom Layer w60: -231.58,926 -211,926 61,926 C1.2 ; C1.2@29,964 C1.2@34,969 ; C31.2@742,820 C33.2@688,820 ; C31.2@745,820 C31.2 ; C33.2@622,824 555,824 C2.2 556.71,823 559.71,820 C33.2@634,820 ; C33.2@622,824 630,824 C33.2@634,820 ; C33.2@622,824 643,845 C33.2 663,845 C33.2@688,820 ; C33.2@634,820 C33.2@688,820
  Bottom Layer w70: BD1.4@-465.12,742.76 BD1.4 ; -234.36,926 -231.58,926 ; -211,926 -390.97,746.03 -466.1,746.03 BD1.4 ; 547,733 544,733 ; C2.2 454,823 ; BD1.4 -243.13,969 34,969 109,969 255,823 454,823 ; 454,823 490,787 ; 490,787 544,733 ; 490,787 448,787 502,733 544,733
  other v1: -28,-1208 70,-1207 108,-1207 174,-1129 224,-1129 -149,-1071 -193,-1062 -167,-1034 -65,-1031 710,-1022 -192,-1004 -155,-991 713.63,-988.62 -66,-987 740.48,-971 -197,-949 744.56,-942.99 338,-786 393,-766 473,-765 994,-754 499,-679 549,-679 599,-679 1146,-659 574,-629 624,-629 1124,-629 1176,-621 599,-579 649,-579 699,-579 749,-579 1099,-579 1149,-579 1199,-579 674,-529 724,-529 1174,-529 1224,-529 699,-479 749,-479 1149,-479 1199,-479 1249,-479 724,-429 774,-429 1174,-429 1224,-429 749,-379 799,-379 849,-379 899,-379 949,-379 1199,-379 1249,-379 1311,-366 774,-329 824,-329 874,-329 924,-329 1074,-329 1224,-329 1274,-329 799,-279 849,-279 899,-279 949,-279 1099,-279 1199,-279 1249,-279 1299,-279 824,-229 874,-229 1124,-229 849,-179 899,-179 824,-129 874,-129 924,-129 849,-79 899,-79 874,-29 924,-29 849,21 899,21 949,21 824,71 874,71 924,71 849,121 899,121 949,121 824,171 874,171 799,221 824,271 799,321 749,421 649,521 699,521 624,571 674,571 549,621 599,621 649,621 524,671 574,671 624,671 435,716 499,721 549,721 599,721 372,740 524,771 574,771 624,771 455,785 392,787 326,789 269,799 499,821 203,835 452,837 393,838 329,840 276,847 153,874 228,876 111,903 184,914 77,936 144,952 101,977
  other v2: -425,-1002 -395,-1002 -440,-972 -410,-972 -380,-972 -455,-942 -425,-942 -395,-942 -470,-912 -440,-912
HEAT_N: P8.1 Q7.2 R74.1 | length 360.7
  Top Layer w20: P8.1@-1111.04,-672.96 P8.1 -1107,-712 -1048.82,-795.83 -1025.27,-821.97 R74.1
  Top Layer w58: P8.1 -1085.34,-650.6 -1070.99,-639.89 Q7.2
  Bottom Layer w58: P8.1 -1085.34,-650.6 -1070.99,-639.89 Q7.2
KEY1: K1.1 K1.2 P1.9 P10.3 | length 1723.8
  Top Layer w22: P10.3 P10.3@-81,-1133 ; v2@-27.02,-1026 -27.02,-918.22 10.73,-880.47 168.73,-880.47 289.98,-844.56 394.41,-806.58 619.71,-807.22 657.63,-829.2 666.73,-834.47 657.91,-828.73 667,-834 P1.9
  Bottom Layer w22: K1.2 -414.87,-1143.13 -346.38,-1211.62 -309.61,-1245 -132.02,-1245 -89.42,-1214.7 -81.68,-1206.96 -81,-1153 P10.3 -81,-1133 -26,-1078 v2(-26,-1026)
  Bottom Layer w30: K1.1 -438.81,-1120.33 K1.2
KEY2: K2.3 K2.4 P1.10 P10.2 | length 1216.9
  Top Layer w20: v2(33,-1039) v1(279.27,-1039) ; v2(579,-760) 642.7,-761.22 666.43,-774.92 P1.10 ; P1.10 675.22,-777 P1.10
  Bottom Layer w20: v1(279.27,-1039) 312.38,-1039 316.26,-1042.88 329.96,-1042.88 K2.3 ; K2.3@316.59,-1042.54 330.29,-1042.54 K2.3@336.92,-1042.54
  Bottom Layer w30: P10.2@22,-1146 P10.2 19,-1053 v2(33,-1039) ; K2.3@329.96,-1049.5 336.92,-1042.54 K2.3 ; K2.3@329.96,-1042.88 330.29,-1042.54 K2.3 ; K2.4@510.91,-861.92 K2.4 ; v2(579,-760) 510.91,-855.3 K2.4 ; K2.3 K2.3@347.19,-1025.64 ; K2.3 K2.3@347.19,-1025.64 ; K2.3@347.19,-1025.64 K2.4 ; K2.3@347.19,-1025.64 K2.4
KEY3: C23.1 P1.4 P11.2 | length 483.8
  Top Layer w20: P11.2 132.32,-914 207,-914 212,-913.5 217,-908.65 225.06,-908.65 225.77,-908.65 276,-909 295.79,-915.27 526.17,-1034.81 525.89,-1035.29 P1.4
LED1: D4.1 D5.2 P1.6 | length 2072.3
  Top Layer w10: P1.6 P1.6@589.01,-964
  Top Layer w20: v1(-639.18,-853.71) -411.38,-740.38 -410.38,-740.38 v1(-410,-740) ; v2(369,-856) 524.29,-924.17 566.27,-948.4 P1.6
  Bottom Layer w20: D4.1 -1063,-375.12 -1063,-405 -944,-629 -922,-629 D5.2 ; D5.2@-916,-635 D5.2 ; v1@-637.82,-853.37 -693,-879 -778,-879 -823,-834 -918.57,-658.47 -918.57,-635 D5.2 ; v1(-410,-740) ccw(c0,0) 279.62,-798.49 v2@368,-855
LED2: D6.2 D7.1 P1.5 | length 1740.3
  Top Layer w20: v1@-702.86,-800.34 v1(-701.5,-799.62) v1@-520.34,-703.67 ; v2(303,-874) 538.98,-995.66 P1.5 574.9,-1011.55 593,-1022 606,-1030 647,-1026 v2(757,-853)
  Bottom Layer w20: D6.2 v1(-701.5,-799.62) ; v1(-518.98,-703.33) ccw(c0,0) 250.52,-837.41 v2(303,-874) ; v2(757,-853) 778.89,-821.96 D7.1
LED3: D8.2 D9.1 P1.7 | length 739
  Top Layer w20: P1.7 625.14,-924.54 645,-936 671,-926 v2(825,-670)
  Bottom Layer w30: v2(825,-670) D8.2 1013,-460 D9.1
NetC5_1: C5.1 Q1.1 R3.2 R39.1 | length 804.4
  Top Layer w20: R39.1 -754.13,-681.61 -597.39,-681.61 v2(-583,-696) ; -388.22,-898.99 C5.1 -402.45,-884.26 v1@-367.5,-884.06 ; -388.22,-898.99 -378.92,-908.28 -348.42,-908.28 Q1.1@-342.67,-914.03 ; -388.22,-898.99 -365.28,-898.99 -359.73,-893.44 ; v1@-367.5,-884.06 -359.73,-893.44 ; v1@-367.5,-884.06 -366.95,-884.06 -356.04,-873.15 -342.7,-873.15 ; v1@-367.5,-884.06 -367.11,-884.44 -345.75,-884.44 -342.7,-887.5 ; v1@-367.5,-884.06 -345.8,-853.31 -343,-851.5 -342.7,-853.31 -342.7,-873.15 ; -359.73,-893.44 Q1.1@-342.67,-914.03 ; -342.7,-887.5 -342.7,-908.28 Q1.1@-342.67,-914.03 ; -342.7,-887.5 -342.7,-873.15
  Bottom Layer w20: v2(-583,-696) v1(-367.5,-884.57)
NetC34_1: C34.1 D13.2 U5.3 | length 41.7
  Bottom Layer w20: C34.1 782.31,688.09
  other v2: 729,683 752,698 778,714 801,730
NetC34_2: C34.2 D14.2 L1.1 U5.1 U5.2 | length 306.1
  Top Layer w20: 871,575 L1.1@942,575
  Bottom Layer w20: v2@804.06,573.94 823.06,573.94 872.12,623 U5.2 885.88,623 911.06,597.82 911.06,585.42 U5.1
  Bottom Layer w30: C34.2 784.38,610.19 804.06,590.51 804.06,573.94 D14.2
  other v2: 798,573 855,578 821,589 830,615 815,639 848,645
NetC37_1: C37.1 R1.1 U9.3 | length 229.4
  Top Layer w20: U9.3@849,-753 U9.3 ; R1.1 898.56,-660.09 R1.1@904.97,-659.07
  Top Layer w24: U9.3@849,-753 R1.1@904.97,-659.07
  Top Layer w30: R1.1@907.66,-661.76 R1.1 C37.1
NetD4_2: D4.2 R61.1 R62.2 | length 180.4
  Bottom Layer w30: D4.2 R61.1 -926.69,-379.29 -924.94,-470.71 R62.2
NetD5_1: D5.1 R60.1 R62.1 | length 176.3
  Bottom Layer w30: D5.1 R60.1 -849,-538 -860,-521 R62.1
NetD6_1: D6.1 R63.1 R65.1 | length 1594.1
  Top Layer w20: v1(-663.36,-822.34) v1@-422.34,-700.31
  Bottom Layer w20: D6.1 -779,-805 -779,-827.28 -767.28,-839 -694,-839 v1@-662,-822 ; v1@-420.98,-699.96 ccw(c0.7,-1.34) 383.11,-722.21 388,-721 619.27,-721 R65.1
  Bottom Layer w30: D6.1 R63.1@-784,-728.29 ; R63.1@-784,-728.29 R63.1 R63.1@-784,-728.29
  other v1: -420.48,-700.27
NetD7_2: D7.2 R64.1 R65.2 | length 215.1
  Bottom Layer w30: R65.2 665.68,-667.77 785.63,-724.7 R64.1@788.47,-727.53 ; D7.2 R64.1@788.47,-727.53 ; R64.1 R64.1@788.47,-727.53
NetD8_1: D8.1 R66.1 R68.1 | length 191.7
  Bottom Layer w30: D8.1 993.18,-567.24 993.87,-561.87 996.53,-558.47 1046,-509 R68.1
NetD9_2: D9.2 R67.1 R68.2 | length 293.1
  Bottom Layer w30: R67.1 R67.1@1141.71,-369.94 ; 1085,-397 1105.8,-376.2 1105.8,-370.93 ; 1085,-397 R68.2 1086.98,-445.37 1090.29,-442.06 1090.29,-421.35 R67.1@1141.71,-369.94 ; 1085,-397 D9.2 1105.8,-370.93 ; 1105.8,-370.93 R67.1@1141.71,-369.94
NetQ7_3: Q7.3 U4.3 | length 331.1
  Top Layer w30: Q7.3 -716.91,-861.48 U4.3
NetR4_2: R4.2 R5.1 | length 232.8
  Bottom Layer w40: R4.2@-1000.37,545.15 R5.1@-938,499 ; R4.2 R5.1 ; R4.2@-988.37,559.15 R5.1@-926,513
NetR38_1: R38.1 R39.2 | length 76.1
  Top Layer w40: R38.1 R39.2
NetR72_1: R72.1 U4.2 | length 76.8
  Top Layer w25: U4.2 -457,-1038 R72.1
NetR73_1: R73.1 R74.2 | length 74.2
  Top Layer w45: R74.2 R73.1
NetR73_2: R73.2 U4.4 | length 91.4
  Top Layer w45: R73.2 U4.4@-763.13,-953.89
SW_WARN: P1.8 R72.2 | length 1211.9
  Top Layer w22: R72.2@-380.55,-1062.28 R72.2 -373.75,-1063 -343,-1063 v1(-285,-1005) ; v2(438,-855) 603.02,-855 645,-876 P1.8
  Bottom Layer w20: v1(-285,-1005) -285,-920.43 -241.16,-876.6 ccw(c0,0) 232.02,-879.06 285,-916 378,-905 v2(438,-855)
  Bottom Layer w22: v2@438,-856 v2(438,-855)
V3.3: C27.1 C38.1 P1.2 P10.4 R2.1 R60.2 R63.2 R66.2 U4.1 U9.2 | length 3660.9
  Top Layer w20: P10.4 P10.4@-181,-1122.18
  Top Layer w30: v2(-320,-1172) -352,-1140 ; -246.3,-1281.95 -241.45,-1285.13 ; P1.2 528,-1158 553.34,-1202.61 ; v2(1069,-632) 1106.27,-676.65 ; 1107,-673 1106.27,-676.65 ; U4.1 -514,-1114 -487,-1124 -386.57,-1140 ; U4.1 -538.62,-1096.92 U4.1 ; -386.57,-1140 -318.58,-1208 ; -386.57,-1140 -352,-1140 ; -352,-1140 -332,-1140 v2(-293,-1140) -318.58,-1173.1 -318.58,-1208 ; -318.58,-1208 -241.45,-1285.13 ; -241.45,-1285.13 158.31,-1288.35 cw(c252.96,-1297) 348,-1296 436.42,-1278.23 443.85,-1273.42 553.34,-1202.61 ; 553.34,-1202.61 712,-1100 C38.1 850,-866 839.91,-871.09 864,-847 867.31,-841.26 950,-889 1002,-859 1096,-728 1106.27,-676.65
  Bottom Layer w30: R60.2@-841.71,-640 -773,-640 -721,-692 R63.2@-721,-728 ; R63.2 -637.27,-785.16 -613.05,-820.7 -570.31,-922.71 -357.31,-1135.71 ; P10.4 -181,-1140 v2(-293,-1140) ; R66.2 v2(1069,-632) ; v2(-293,-1140) v1(-334,-1140) -354,-1140 -322,-1172 v2(-320,-1172) v2(-293,-1140)
V12: C35.1 C39.1 D13.1 D15.2 L1.2 P1.16 P1.17 R1.2 R30.2 | length 2447.1
  Top Layer w40: 902,-535 938.3,-524.69 967.83,-516.31 ; R1.2 945.05,-563.24 967.83,-516.31 ; R1.2@953,-552 980.86,-531.66 990.56,-469.49 ; D13.1@973,797 1056.89,713.11 L1.2 ; v2(1012,-239) 992.94,-233.64 ; 1029,-223 1026.16,-241.21 ; 967.83,-516.31 990.56,-469.49 ; 990.56,-469.49 1022.07,-267.41 ; 992.94,-233.64 1003.72,-246.14 1022.07,-267.41 ; 992.94,-233.64 993.62,-231.89 1003.63,-206.02 1013.64,-180.13 1014.39,-178.2 ; 992.94,-233.64 v2(980,-230) 988.14,-201.35 v2(997.17,-169.6) 1014.39,-178.2 ; 1014.39,-178.2 v2(1034,-188) 1030.85,-209.4 1029.51,-218.45 1026.18,-241.09 1026.16,-241.21 ; 1022.07,-267.41 1026.16,-241.21
  Top Layer w60: C35.1 887.86,437.14 888.86,437.14 903.5,422.5 1059.5,422.5 1141.15,504.15 1141.15,587.03 1066,682 L1.2
  Bottom Layer w40: C35.1 885,430.22 902.61,412.61 902.61,367.17 D15.2@942,317 ; D15.2 D15.2@942,317 ; D15.2@942,317 945.04,311.94 R30.2 990,235 1010,215 1039,177 999.36,-151.47 ; v2@992.43,-208.85 994.62,-210.49 996.07,-211.57 1019.43,-229.08 1028.25,-235.68 1030,-237 ; v2@992.43,-208.85 993.01,-204.04 994.98,-187.72 ; v2@992.43,-208.85 990,-229 995.96,-230.19 1013.08,-233.62 1030,-237 ; 994.98,-187.72 1004.39,-189.82 1032.21,-196.04 1041,-198 ; 994.98,-187.72 v2(997.17,-169.6) 999.36,-151.47 ; 999.36,-151.47 1007.39,-160.45 1032.92,-188.97 1041,-198 ; 1030,-237 1035.18,-218.64 1041,-198
  other v2: 1040,-220 1001,-205
V310: C1.1 C2.1 C3.1 C31.1 C33.1 L3.2 pad.V310 U5.4 U5.5 U5.6 U5.7 | length 4223.7
  Top Layer w70: L3.2@-333,1086 -333,1175 -305,1203 20,1203 C1.1 -247,1167 L3.2
  Bottom Layer w60: C31.1@770,960 C31.1
  Bottom Layer w70: C33.1@647.5,990.5 615,1023 C2.1 553,1022 369,1022 224,1167 C1.1 ; C33.1@663,991 739,991 ; U5.7@1086,716 1059.77,749.62 1029.06,789 998.35,828.37 891,966 ; U5.7 1087.1,706.25 1087.1,705.98 cw(c794.94,401.38) 1217,401.17 ; v1@1206,-123 1217,-112 1217,49 1217,401.17 ; 1217,401.05 1217,401.17 ; C1.1 20,1199 C1.1@52,1199 ; C1.1 C1.1@52,1199 ; C1.1@52,1199 257,1199 389,1067 554,1067 663,1067 ; 663,1067 cw(c663,760.39) 824.2,1021.21 ; 663,1067 725.5,1004.5 ; 725.5,1004.5 783.87,1004.5 ccw(c783.87,1061.54) 824.2,1021.21 ; 725.5,1004.5 739,991 ; 739,991 764,966 891,966 ; 824.2,1021.21 cw(c663,760.39) 879.75,977.25 879.97,977.03 891,966
  other v1: 1232,-149 1203,-147 1179,-135 1245,-127 1216,-125 1158,-120 1137,-109 1258,-106 1230,-103 1243,-82
V310_IN: BD1.1 L3.1 | length 264.7
  Top Layer w80: BD1.1 -770.57,1076.71 cw(c-699.86,1006) -699.86,1106 L3.1
ZERO_CHK: C4.1 P1.1 Q1.3 R2.2 | length 1110.9
  Top Layer w20: Q1.3@-260,-949 -232.94,-976.39 -234,-1152.84 -235.55,-1199.93 -235.55,-1216.5 -230.38,-1221.7 -204,-1247 132.85,-1246.35 cw(c253,-1296) 374.44,-1249.6 399.61,-1243.6 417.32,-1239.39 444.96,-1227.97 453.64,-1219.3 471.81,-1187.82 P1.1

## Polygon pours and split planes (outlines as drawn)
GND on Bottom Layer "GND_L02_P001" (solid, remove dead copper, pour order 1): -573.66,-1220.04 -558,-1180.29 -548.12,-1169.12 cw(c-481.53,-1240.7) -478,-1143 -472.36,-1144.25 cw(c-474.91,-1222.48) -396.68,-1225.04 -330.36,-1252.64 -280.55,-1274 -262.06,-1313 174,-1313 174,-1298 cw(c253,-1298) 253,-1219 cw(c253,-1299) 333,-1299 333,-1305 407.61,-1305 408.74,-1306.14 476.93,-1278.79 915,-1013 967,-987 962,-949 973,-937 1027,-878 1071,-825 1107,-775 1131,-740 1154,-703 1182,-656 1210,-601 1248,-516 1284,-419 1293,-389 1323,-374 1322,-216 1318,-216 1080,-205 1040,-262 968,-248 789.77,-187.68 786.5,-184.5 731.75,-329.25 681,-426 625,-507 589.35,-549.07 468,-653 400.82,-697 319.01,-739.15 142.32,-797.74 -34,-803 -121,-794 -198.2,-778.2 -295.75,-747.49 -326,-733 -384,-705 -439,-671 -483,-640 -524,-607 -545,-589 -585,-549 -621,-507 -650,-469 -670,-440 -676,-431 -682,-421 -686,-414 -712,-370 -733,-326 -745,-297 -888,-355 -912,-356 -898,-464 -880.5,-587.44 -1097.59,-781.9 -982.68,-922.44 -817,-1076 -682.71,-1164.45 -590.47,-1211.47
GND on Bottom Layer "NONET_L-01_P-001" (solid, remove dead copper, pour order 12): 152.5,796.26 152.56,796.24 cw(c163.5,829.5) 138.74,804.74 10.05,933.43 cw(c20,967) 20,1002.01 111,1002.01 cw(c111,967) 135.81,991.71 135.76,991.76 250.52,877 ccw(c225.71,852.29) 250.47,877.05 ccw(c225.71,852.29) 250.42,877.1 250.47,877.05 ccw(c296.42,923) 296.42,858.01 554,858.01 cw(c554,823) 589.01,823 cw(c554,823) 578.71,798.19 578.76,798.24 549.77,769.25 cw(c516,760) 551.02,760 cw(c516,760) 544.65,739.87 552.76,731.76 cw(c528,707) 563.02,707 cw(c528,707) 543.56,675.63 cw(c509,670) 544.02,670 cw(c509,670) 490.77,640.1 369.63,713.97 282.27,753.33 152.56,796.24 152.5,796.26 cw(c163.5,829.5)
GND on Bottom Layer "GND_L02_P002" (solid, remove dead copper, pour order 2): 478,856 478,648.79 521.33,609.36 547,586 552,581 571.23,563.22 588,545 610.05,521.04 620.2,508.16 630,497 636.9,487.92 640,483 658.5,459.5 668,447 691,407 705.21,382.59 723,348 741,313 758,264 770.19,227.05 777,200 789.29,151.15 793,120 798,78 799,75 802,4 800.04,-77.01 798,-91 791,-139 786,-157 774,-216 852,-319 853.98,-317.02 922.58,-317.02 922.58,-312.42 929.54,-255.82 964.89,-28.11 968.11,11 974.94,51.04 989,151.15 968.11,188.21 934.42,233.46 884.5,307.5 812,432 779,508.16 705.21,633 723.65,821.3 688.95,856
GND on Top Layer "GND_L01_P004" (solid, remove dead copper, pour order 4): 871.31,356.79 710.18,373.87 718.28,358.15 720.42,354 740,316 744.33,304.86 750,289 760,261 770,222 786.5,174 799.56,85.94 802.11,4.89 786.5,-184.5 781,-202 1174,-595 1208,-595 1214,-589 1215,-589 1220,-581 1229,-564 1242,-534 1254,-506 1261,-485 1267,-469 1271.54,-456.89 1275,-447 1278.34,-438.75 1280,-432 1281.99,-427 1284,-422 1285.86,-415.95 1288,-411 1289.72,-404.9 1291,-401 1294,-391 1299.94,-386.98 1304,-385 1312,-381.1 1316.06,-379.12 1324,-375 1324,-372 1323.9,-237.9 1324,358.15
GND on Top Layer "GND_L01_P000" (solid, remove dead copper, pour order 0): 103.05,-796.89 182.85,-780.49 319.7,-739 446,-672 490.41,-639.54 572.08,-567.09 640,-487 649,-478 706,-385 731.75,-329.25 786.5,-184.5 1208,-595 915,-1013 476.93,-1278.79 408.74,-1306.14 407.61,-1305 319,-1305 303.84,-1274 289.65,-1245 217.54,-1245 198.81,-1274 190,-1309 186,-1313 -279,-1313 -279,-1312 -317,-1274 -367,-1274 -381,-1288 -412,-1288 -425.01,-1274.99 -425.01,-1227.15 -425,-1200 -424.96,-1178 -424.98,-1164 -425.01,-1140.01 -465.11,-1067.02 -485,-922 -522.52,-889.45 -379.68,-705.95 -324,-735 -265.5,-759.5 -145.93,-791.41 -71.06,-800.5 5.98,-802.63
GND on Top Layer "NONET_L-01_P-001" (solid, pour order 7): 152.5,796.26 152.56,796.24 cw(c163.5,829.5) 138.74,804.74 10.05,933.43 cw(c20,967) 20,1002.01 111,1002.01 cw(c111,967) 135.81,991.71 135.76,991.76 250.52,877 ccw(c225.71,852.29) 250.47,877.05 ccw(c225.71,852.29) 250.42,877.1 250.47,877.05 ccw(c296.42,923) 296.42,858.01 554,858.01 cw(c554,823) 589.01,823 cw(c554,823) 578.71,798.19 578.76,798.24 549.77,769.25 cw(c516,760) 551.02,760 cw(c516,760) 544.65,739.87 552.76,731.76 cw(c528,707) 563.02,707 cw(c528,707) 543.56,675.63 cw(c509,670) 544.02,670 cw(c509,670) 490.77,640.1 369.63,713.97 282.27,753.33 152.56,796.24 152.5,796.26 cw(c163.5,829.5)
GND on Top Layer "NONET_L-01_P-001" (solid, pour order 10): 477.77,644.64 370,708 275,750 155.92,783.86 7,932.77 7,993 16,1002 125.52,1002 250.49,877.03 ccw(c296.42,922.96) 296.42,858 583.34,858 cw(c583.34,840.93) 595.41,853 595.41,597.68 534.17,597.68
GND on Top Layer "GND_L01_P006" (solid, remove dead copper, pour order 6): 857,355 720.42,353.22 704.98,383.23 690.77,407.64 667.77,447.64 658.27,460.14 639.77,483.64 636.67,488.56 629.77,497.64 619.97,508.79 609.83,521.68 587.77,545.64 571.01,563.85 551.77,581.64 546.77,586.64 521.1,610 513.79,616.65 492.77,633.64 477.77,644.64 477.77,853 595.41,853 714.77,733.64 704.98,633.64 778.77,508.79 811.77,432.64

## Keep-outs
Keep-Out Layer:
  lines w26: -1109,-604 -1058,-572
  lines w28: -1045,-685 -998,-649
  lines w50: -1316,-187 -1235,-164 ; -812,929 -736,1005 -655,1005 ; -705,824 -629,900 ; -568,750 -492,826
  lines w80: -1014,-286 -1014,-210 -977,-173 -977,-141 -977,389
Mechanical 1:
  lines w3.94: -1322.53,386.88 cw(c0,0) -568.1,1255.4 ; -1322.52,386.89 -1350.39,375.98 -1350.39,-375.98 -1318.9,-452.76 -1275.59,-523.62 -1123.85,-755.76 ccw(c0,0) -583.05,-1222.4 ; -568,1255.19 -221.19,1255.19 -145.67,1330.71 163.39,1330.71 cw(c163.39,1312.99) 181.1,1312.99 179.13,1293.31 ccw(c208.66,1293.31) 203.6,1264.22 235.3,1260.24 ccw(c240.16,1289.37) 269.24,1284.24 279.53,1312.99 316.93,1305.12 301.94,1256.97 ccw(c352.36,1240.16) 402.7,1223.11 430.98,1283.93 ; -547.24,-1240.16 -531.15,-1205.3 cw(c-484.25,-1230.31) -434.31,-1248.49 -446.85,-1279.53 -383.14,-1304.29 cw(c-340.55,-1332.68) -291.11,-1319.43 ; -291.11,-1318.9 196.85,-1318.9 201.56,-1290.32 cw(c251.97,-1299.21) 300.06,-1281.71 314.96,-1318.9 370.08,-1318.9 415,-1311 452,-1301 972.99,-988.59 965.98,-949.26 ccw(c0,0) 1296.41,-391.82 ; 430.97,1283.93 cw(c0,0) 1295.15,395.97 1326.77,375.98 1326.77,64.96 1326.77,-375.98 1295.67,-392.51

## Other copper
Top Layer:
  region net GND: 1065.63,204.2 1248.11,97.01 1312.41,206.48 1129.94,313.67
  region net GND: 725.97,-769.06 840.56,-570.03 790.03,-540.94 675.44,-739.97
  pour cut-out: -327,-899 -267,-899 -243,-923 -243,-954 -313.48,-1024.48 -325,-1013.02 -325,-904.43
  pour cut-out: -136,-1141 -136,-1228 -145,-1237 -195,-1237 -228,-1204 -228,-1155
  pour cut-out: 920,-780 925,-848 940,-858 978,-849 1038,-775 978.4,-736.83 947,-718
  pour cut-out: 754,-894 788.67,-913.92 841,-841 876.98,-706.04 865,-665 847,-666 825,-705 732.77,-863.04
  pour cut-out: 735,-1063 813.53,-984.47 813.53,-916.71 848.29,-916.71 886,-879 889,-882 1019,-882 1019,-990 798,-1211 735,-1211
  pour cut-out: 295,-1160 295,-1110 298,-1107 338,-1107 365,-1080 365,-975 435,-975 498,-1038 495,-1053 469,-1097 456,-1200 437,-1219 357,-1219
  region net V310: 1241.68,-68.56 1257,-78 1270.04,-106.02 1238.29,-161.41 1202.72,-161.43 1176,-146 1060,-79 1110,7
  pour cut-out: 1077.25,122.91 1110.94,176.39 1323.08,54.14 1323.67,-51.33 1324,-218 1325,-219 1210.56,-219 1142,-215.21 995,-145 984.88,-155.12 959.98,-154.99 959.98,-57.64 1064,105
  pour cut-out: 828,-598 843,-573 969.46,-626.25 932.45,-697.79 808.5,-644.19 829,-595
  region net V12: 840,-455 870,-472 930.5,-506.5 989,-542 994,-551 989,-565 965,-606 933.21,-587.4 879.59,-567.77 800,-523
  region net NetC34_1: 847.99,729.95 819,738 801,743 742,705 718,689 718,676 746,642 749,638 767,651 842,699
  region net NetC34_2: 860.33,655.95 812.59,652.13 763,617 781.69,577.31 815.09,527.46 816,527 825,527 910.44,585.44
Bottom Layer:
  pour cut-out: -327,-1200 -300,-1227 -130,-1227 -101,-1198 -101,-1108 -107,-1102 -230,-1102 -327,-1199
  region net V310: 1184.7,-1 1217,-1 1270.03,-54.03 1270.03,-106.02 1238.27,-161.43 1202.72,-161.43 1129.13,-118.77 1123,-112.64 1123.05,-107.03
  region net NetC34_1: 732,662 718,676 718,689 801,743 830,735 854,728 854,713 780,660 749,638
  region net NetC34_2: 816,527 843,544 882,549 947,595 919.47,635.75 911,647 894,664 810,651 763,617

## Silkscreen, mask and mechanical layers (free items; w line width, h text height)
Top Overlay:
  circle w5: c-484.25,-1232.28 r89.19
  circle w5: c253,-1296 r33.46
  circle w5: c-484.25,-1232.28 r89.19
  lines w1: 302.72,-1124.35 1128.22,305.46
  lines w5: -561.3,-1252.4 cw(c-484.25,-1232.28) -520.19,-1161.22 ; -441.52,-1299.48 ccw(c-484.25,-1232.28) -409.55,-1204.7 ; 184.36,-1257.82 cw(c252.87,-1299.21) 290.28,-1228.44 ; 184.61,-1258.2 ccw(c252.87,-1299.21) 198.38,-1357.28 ; 300.3,-1235.24 cw(c252.87,-1299.21) 325.41,-1332.07 ; 302.72,-1124.35 479.39,-1226.35 1301.89,198.26 1304.89,203.46 1128.22,305.46
  lines w10: -1315.74,-350.95 -1047,-350.95 ; -1131,-149 -862.26,-149
  text "WCH_hairDrierBOTTOM_COM_V1.5" at 1053.1,141.79 h48 r239.91
  text "L" at -1235,-97 h60
  text "N" at -1220,-421 h60
  text "HT_N" at -1261.63,-538.25 h40 r304.77
  text "V3.3" at -199,-1188 h36 r270
  text "CLK" at -100,-1188 h36 r270
  text "DIO" at -1,-1188 h36 r270
  text "GND" at 101,-1188 h36 r270
Bottom Overlay:
  lines w6: -153.84,-1043 -153.84,-1073 91.84,-1073 91.84,-1043 ; -231,-1273 -231,-1043 169,-1043 169,-1273 -231,-1273
  text "N" at -1172.35,-322.8 h60
  text "HT_N" at -1030.29,-850.19 h40 r306.94
  text "V3.3" at -162,-1188 h36 r90
  text "GND" at 137,-1188 h36 r90
  text "CLK" at -65,-1189 h36 r90
  text "DIO" at 35,-1189 h36 r90
Top Solder:
  lines w60: 1253,163 1266,124 ; 1259,62.62 1290,114 1273,190
Bottom Solder:
  lines w60: -1122,-675 -1050.95,-626.51
  lines w67: -1236,-477 -1105.58,-539.76
  lines w80: -1299,-103 -1299,72 ; -1263.23,-249.31 -1281,-267.08 -1281,-399 -1236,-477 ; -1198.01,448.32 -1136.95,656.16 ; -951.82,910.97 -884.85,844 -791.57,844 -714.62,920.95 ; -914.85,-249.76 -880,-214.91 -880,308 -786.59,401.41 ; -601.46,656.41 -640,684 -640,783.85 -591.99,831.85
Mechanical 1:
  drawing of 466 lines, arcs and shapes, not listed